# Altium PCB EsoCore_Edge.PcbDoc (part 2 of 6)
Units mil, origin at the board's own origin, x right, y up, seen from the top; angles counter-clockwise.
Board outline 6732.28 x 3385.83 mil, 4 copper layers (Top Layer, Layer 1, Layer 2, Bottom Layer), stack 61.58 mil thick; 330 components, 239 nets, 1236 pads, 712 vias.
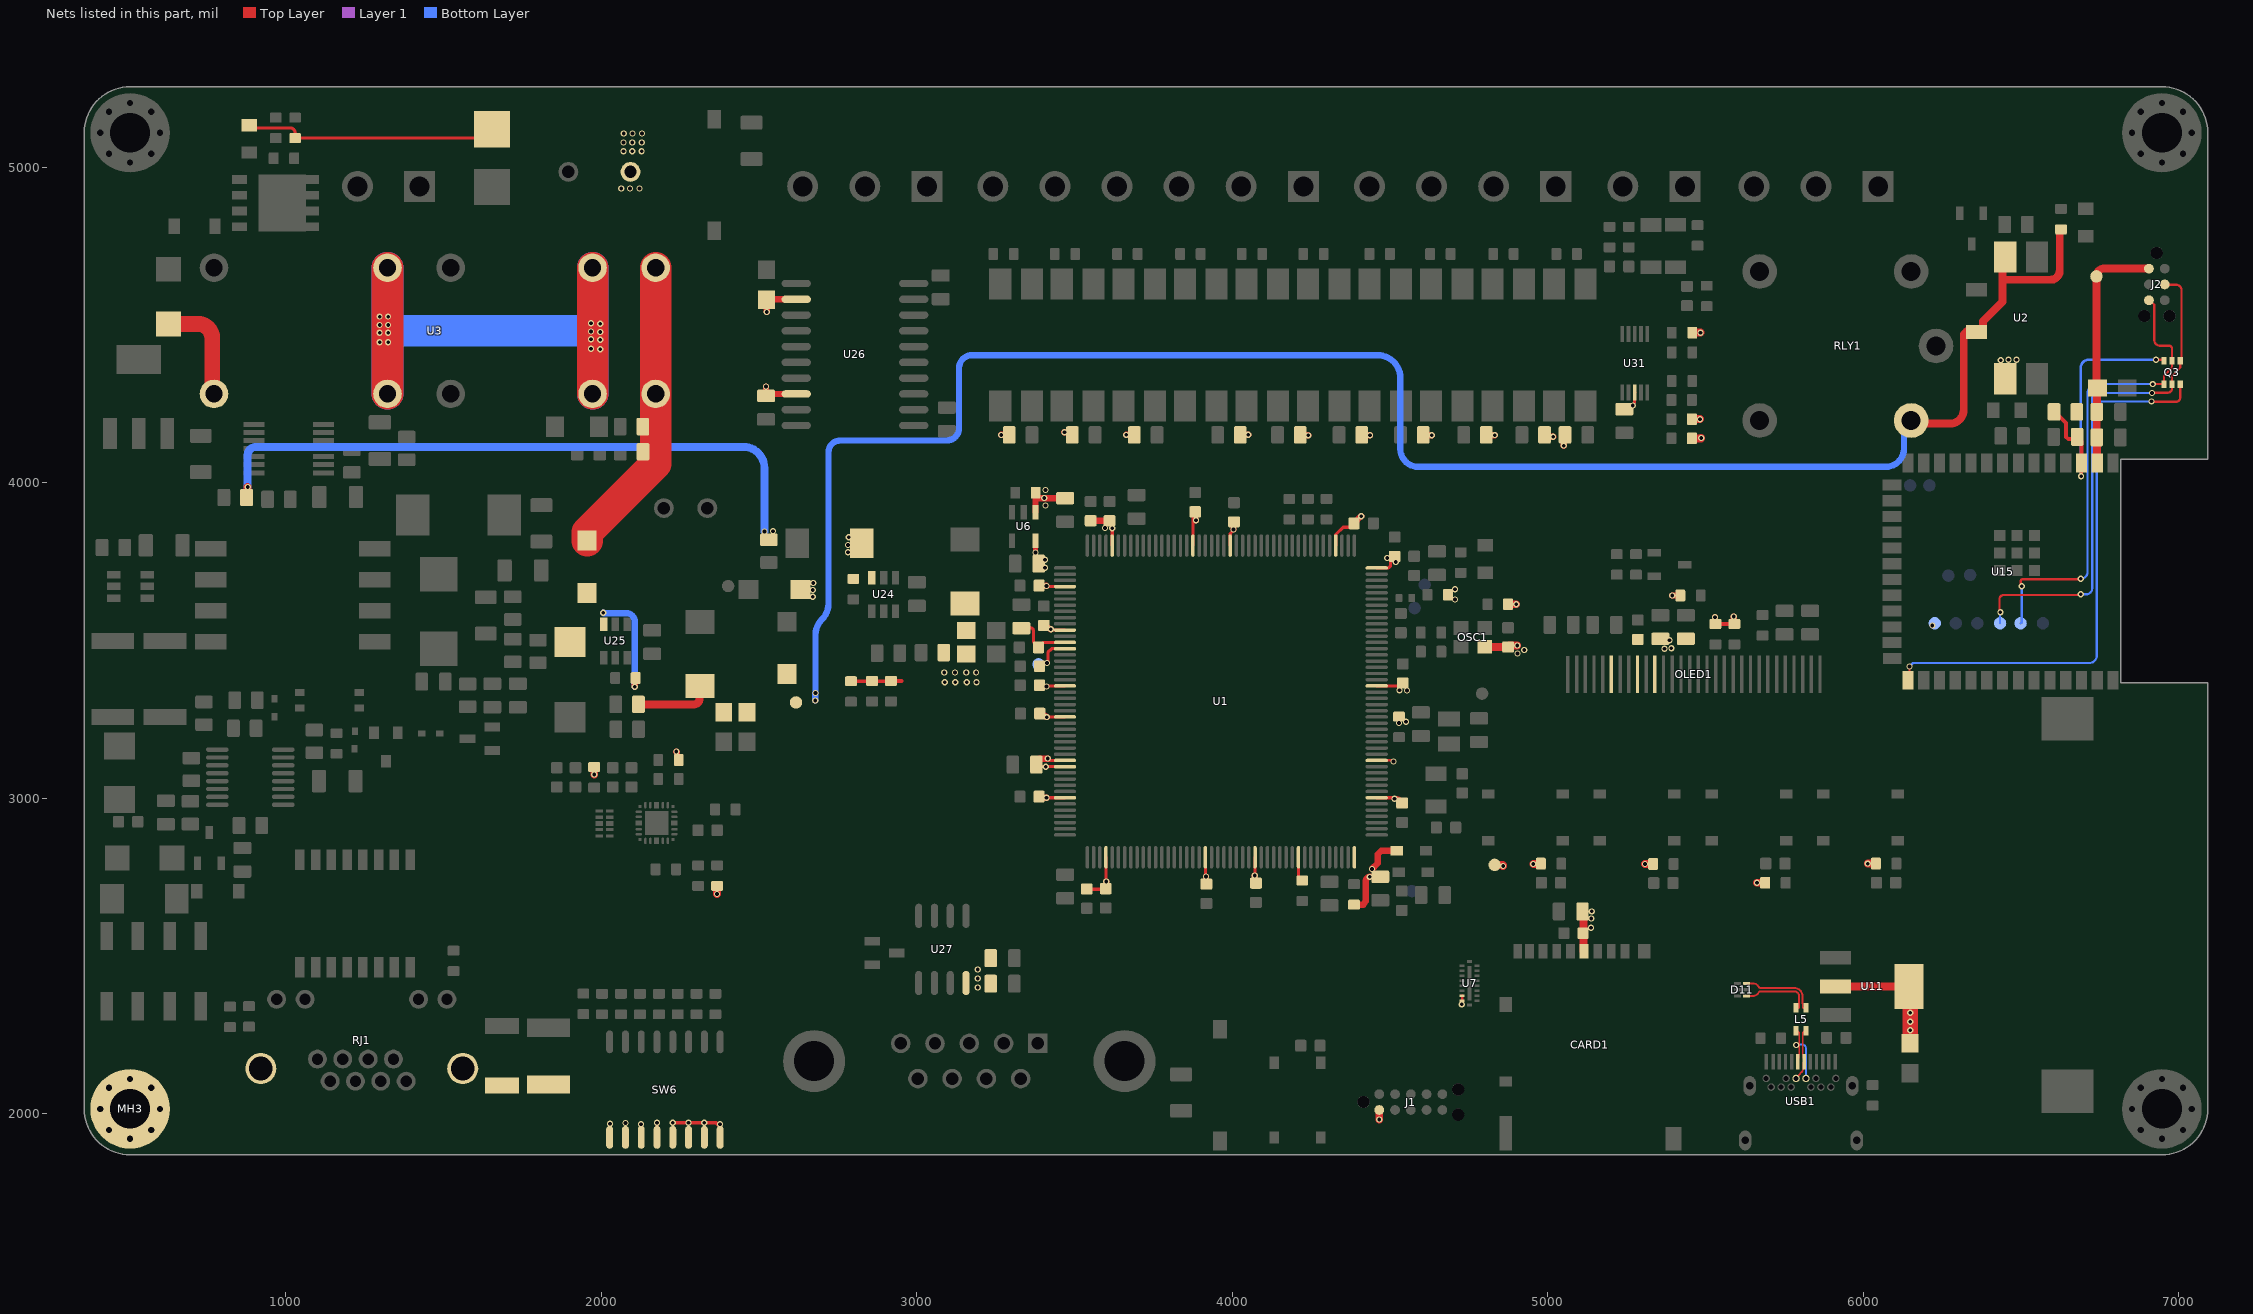
[diagram p4: the nets of this part, all layers, seen from the top]

## Part data
BT1: JLCPCB Part Class="Extended Part", Manufacturer=Keystone, Add into BOM=yes, Convert to PCB=yes, Datasheet=https://atta.szlcsc.com/upload/public/pdf/source/20230320/C1BE6CFA374F9ACD78161F1E1BA128C8.pdf, Device=1060TR, LCSC Part Name=1060TR, Manufacturer Part=1060TR, Supplier=LCSC, Supplier Footprint=SMD, Supplier Part=C238069, Symbol=1060TR
C1 C3 C4 C5 C6 C7 C8 C9 C10 C17 C18 C19 C20 C28 C30 C31 C32 C33 C34 C35 C37 C41 C42 C43 C45 C46 C49 C50 C55 C56 C58 C62 C80 C101 C102: library part CC0603KRX7R9BB104, JLCPCB Part Class="Basic Part", LCSC Part Name="100nF ±10% 50V", Manufacturer=YAGEO(国巨), Temperature Coefficient=X7R, Tolerance=±10%, Voltage Rating=50V, Add into BOM=yes, Convert to PCB=yes, Datasheet=https://item.szlcsc.com/datasheet/CC0603KRX7R9BB104/15331.html, Device=CC0603KRX7R9BB104, Manufacturer Part=CC0603KRX7R9BB104, Supplier=LCSC, Supplier Footprint=0603, Supplier Part=C14663, Symbol=CC0603KRX7R9BB104
C2 C21 C85 C86 C89 C90 C91: library part TAJA226K010RNJ, Equivalent Series Resistance(ESR)=3Ω@100kHz, JLCPCB Part Class="Extended Part", LCSC Part Name="22uF ±10% 10V", Manufacturer="Kyocera AVX", Operating Temperature=-55℃~+125℃, Tolerance=±10%, Voltage Rating=10V, Add into BOM=yes, Convert to PCB=yes, Device=TAJA226K010RNJ, Manufacturer Part=TAJA226K010RNJ, Supplier=LCSC, Supplier Footprint=CASE-A-3216-18(mm), Supplier Part=C11366, Symbol=TAJA226K010RNJ
C11 C27 C29 C53 C54 C57 C74 C78: library part CL21B105KBFNNNE, JLCPCB Part Class="Basic Part", LCSC Part Name="1uF ±10% 50V", Manufacturer=SAMSUNG(三星), Temperature Coefficient=X7R, Tolerance=±10%, Voltage Rating=50V, Add into BOM=yes, Convert to PCB=yes, Datasheet=https://item.szlcsc.com/datasheet/CL21B105KBFNNNE/29074.html, Device=CL21B105KBFNNNE, Manufacturer Part=CL21B105KBFNNNE, Supplier=LCSC, Supplier Footprint=0805, Supplier Part=C28323, Symbol=CL21B105KBFNNNE
C12 C13 C22 C23 C24 C39 C51 C75: library part CL21A475KBQNNNE, JLCPCB Part Class="Extended Part", LCSC Part Name="4.7uF ±10% 50V", Manufacturer=SAMSUNG(三星), Temperature Coefficient=X5R, Tolerance=±10%, Voltage Rating=50V, Add into BOM=yes, Convert to PCB=yes, Datasheet=https://item.szlcsc.com/datasheet/CL21A475KBQNNNE/99401.html, Device=CL21A475KBQNNNE, Manufacturer Part=CL21A475KBQNNNE, Supplier=LCSC, Supplier Footprint=0805, Supplier Part=C98192, Symbol=CL21A475KBQNNNE
C14: library part CL10A106KP8NNNC, JLCPCB Part Class="Basic Part", LCSC Part Name="10uF ±10% 10V", Manufacturer=SAMSUNG(三星), Temperature Coefficient=X5R, Tolerance=±10%, Voltage Rating=10V, Add into BOM=yes, Convert to PCB=yes, Datasheet=https://item.szlcsc.com/datasheet/CL10A106KP8NNNC/20411.html, Device=CL10A106KP8NNNC, Manufacturer Part=CL10A106KP8NNNC, Supplier=LCSC, Supplier Footprint=0603, Supplier Part=C19702, Symbol=CL10A106KP8NNNC
C15: library part TAJC106K035RNJ, Equivalent Series Resistance(ESR)=1.6Ω@100kHz, JLCPCB Part Class="Extended Part", LCSC Part Name="10uF ±10% 35V", Manufacturer="Kyocera AVX", Operating Temperature=-55℃~+125℃, Tolerance=±10%, Voltage Rating=35V, Add into BOM=yes, Convert to PCB=yes, Device=TAJC106K035RNJ, Manufacturer Part=TAJC106K035RNJ, Supplier=LCSC, Supplier Footprint=CASE-C-6032-28(mm), Supplier Part=C7211, Symbol=TAJC106K035RNJ
C16 C36: library part CL10C180JB8NNNC, JLCPCB Part Class="Basic Part", LCSC Part Name="18pF ±5% 50V", Manufacturer=SAMSUNG(三星), Temperature Coefficient=C0G, Tolerance=±5%, Voltage Rating=50V, Add into BOM=yes, Convert to PCB=yes, Datasheet=https://item.szlcsc.com/datasheet/CL10C180JB8NNNC/1999.html, Device=CL10C180JB8NNNC, Manufacturer Part=CL10C180JB8NNNC, Supplier=LCSC, Supplier Footprint=0603, Supplier Part=C1647, Symbol=CL10C180JB8NNNC
C25 C26 C59 C103: JLCPCB Part Class="Extended Part", Manufacturer=SAMSUNG(三星), Manufacturer Part=CL21A106KOQNNNE, nameAlias=Value, spicePre=C, spiceSymbolName=CL21A106KOQNNNE, Supplier=LCSC, Supplier Part=C1713
C38 C52 C63: library part CL21B225KAFNNNE, JLCPCB Part Class="Extended Part", LCSC Part Name="2.2uF ±10% 25V", Manufacturer=SAMSUNG(三星), Temperature Coefficient=X7R, Tolerance=±10%, Voltage Rating=25V, Add into BOM=yes, Convert to PCB=yes, Datasheet=https://item.szlcsc.com/datasheet/CL21B225KAFNNNE/19814.html, Device=CL21B225KAFNNNE, Manufacturer Part=CL21B225KAFNNNE, Supplier=LCSC, Supplier Footprint=0805, Supplier Part=C19110, Symbol=CL21B225KAFNNNE
C40: library part SLA3R8L2060813, Current - Leakage=-, Equivalent Series Resistance(ESR)=500mΩ, JLCPCB Part Class="Extended Part", LCSC Part Name="20F -10%~+30% 3.8V", Manufacturer=Ymin(永铭), Operating Temperature=-40℃~+85℃, Tolerance=-10%~+30%, Voltage Rating=3.8V, Add into BOM=yes, Convert to PCB=yes, Datasheet=https://item.szlcsc.com/datasheet/SLA3R8L2060813/1059775.html, Device=SLA3R8L2060813, Diameter=8mm, Height - Seated(Max)=-, Lifetime=1000hrs@85℃, Manufacturer Part=SLA3R8L2060813, Supplier=LCSC, Supplier Footprint=插件,P=3.5mm, Supplier Part=C970391, Symbol=SLA3R8L2060813
C44: JLCPCB Part Class="Extended Part", Manufacturer=YAGEO(国巨), Manufacturer Part=CC0603KRX7R9BB471, nameAlias=Value, spicePre=C, spiceSymbolName=CC0603KRX7R9BB471, Supplier=LCSC, Supplier Part=C107092
C47 C48: library part CL10B223KB8NNNC, JLCPCB Part Class="Basic Part", LCSC Part Name="22nF ±10% 50V", Manufacturer=SAMSUNG(三星), Temperature Coefficient=X7R, Tolerance=±10%, Voltage Rating=50V, Add into BOM=yes, Convert to PCB=yes, Datasheet=https://item.szlcsc.com/datasheet/CL10B223KB8NNNC/21834.html, Device=CL10B223KB8NNNC, Manufacturer Part=CL10B223KB8NNNC, Supplier=LCSC, Supplier Footprint=0603, Supplier Part=C21122, Symbol=CL10B223KB8NNNC
C60 C61: JLCPCB Part Class="Extended Part", Manufacturer=SAMSUNG(三星), Manufacturer Part=CL21B104KBCNNNC, nameAlias=Value, spicePre=C, spiceSymbolName=CL21B104KBCNNNC, Supplier=LCSC, Supplier Part=C1711
C64: library part ERG35V470M10X16, Equivalent Series Resistance(ESR)=46mΩ@100kHz, JLCPCB Part Class="Extended Part", LCSC Part Name="470uF ±20% 35V", Manufacturer=JIERR(捷而瑞), Operating Temperature=-40℃~+105℃, Ripple Current=1.326A@100kHz, Tolerance=±20%, Voltage Rating=35V, Add into BOM=yes, Convert to PCB=yes, Datasheet=https://item.szlcsc.com/datasheet/ERG35V470M10X16/51248506.html, Device=ERG35V470M10X16, Diameter=10mm, Height - Seated (Max)=16mm, Lifetime=2000hrs@105℃, Manufacturer Part=ERG35V470M10X16, Pin Spacing=5mm, Supplier=LCSC, Supplier Footprint=插件,D10xL16mm, Supplier Part=C48935386, Symbol=ERG35V470M10X16
C72: library part CC1206JRNPOBBN471, JLCPCB Part Class="Extended Part", LCSC Part Name="470pF ±5% 500V", Manufacturer=YAGEO(国巨), Temperature Coefficient=NP0, Tolerance=±5%, Voltage Rating=500V, Add into BOM=yes, Convert to PCB=yes, Datasheet=https://item.szlcsc.com/datasheet/CC1206JRNPOBBN471/604677.html, Device=CC1206JRNPOBBN471, Manufacturer Part=CC1206JRNPOBBN471, Supplier=LCSC, Supplier Footprint=1206, Supplier Part=C577186, Symbol=CC1206JRNPOBBN471
C73: JLCPCB Part Class="Extended Part", Manufacturer=YAGEO(国巨), Manufacturer Part=AC1206JRNPO0BN680, Contributor=lcsc, nameAlias=Value, spicePre=C, spiceSymbolName=AC1206JRNPO0BN680, Supplier=LCSC, Supplier Part=C2227849
C76: library part TAJD337K010RNJ, Equivalent Series Resistance(ESR)=900mΩ@100kHz, JLCPCB Part Class="Extended Part", LCSC Part Name="330uF ±10% 10V", Manufacturer="Kyocera AVX", Operating Temperature=-55℃~+125℃, Tolerance=±10%, Add into BOM=yes, Convert to PCB=yes, Datasheet=https://atta.szlcsc.com/upload/public/pdf/source/20160107/1457707750344.pdf, Device=TAJD337K010RNJ, Manufacturer Part=TAJD337K010RNJ, Supplier=LCSC, Supplier Footprint=CASE-D-7343, Supplier Part=C7226, Symbol=TAJD337K010RNJ
C77: JLCPCB Part Class="Extended Part", Manufacturer=YAGEO(国巨), Manufacturer Part=CC0805JRX7R9BB333, Contributor=LCSC, nameAlias=Value, spicePre=C, spiceSymbolName=CC0805JRX7R9BB333, Supplier=LCSC, Supplier Part=C520043
C79 C84: library part TAJC475K035RNJ, Equivalent Series Resistance(ESR)=2.2Ω@100kHz, JLCPCB Part Class="Extended Part", LCSC Part Name="4.7uF ±10% 35V", Manufacturer="Kyocera AVX", Operating Temperature=-55℃~+125℃, Tolerance=±10%, Voltage Rating=35V, Add into BOM=yes, Convert to PCB=yes, Device=TAJC475K035RNJ, Manufacturer Part=TAJC475K035RNJ, Supplier=LCSC, Supplier Footprint=CASE-C-6032-28(mm), Supplier Part=C11378, Symbol=TAJC475K035RNJ
C81: JLCPCB Part Class="Extended Part", Manufacturer=YAGEO(国巨), Manufacturer Part=CC0805JRX7R9BB273, Contributor=LCSC, nameAlias=Value, spicePre=C, spiceSymbolName=CC0805JRX7R9BB273, Supplier=LCSC, Supplier Part=C520042
C82: library part 2.2nF, JLCPCB Part Class="Extended Part", Manufacturer=FH(风华), Manufacturer Part=1206B222K251NT, Contributor=LCSC, nameAlias=Value, spicePre=C, spiceSymbolName=1206B222K251NT, Supplier=LCSC, Supplier Part=C507085
C83 C87 C92 C93 C94 C95 C96 C97: JLCPCB Part Class="Basic Part", Manufacturer=YAGEO(国巨), Manufacturer Part=CC0805KRX7R9BB104, nameAlias=Value, spicePre=C, spiceSymbolName=CC0805KRX7R9BB104, Supplier=LCSC, Supplier Part=C49678
C98: JLCPCB Part Class="Basic Part", Manufacturer=SAMSUNG(三星), Manufacturer Part=CL31A106KBHNNNE, nameAlias=Value, spicePre=C, spiceSymbolName=CL31A106KBHNNNE, Supplier=LCSC, Supplier Part=C13585
C99: JLCPCB Part Class="Extended Part", Manufacturer=SAMSUNG(三星), Manufacturer Part=CL31B475KBHNNNE, nameAlias=Value, spicePre=C, spiceSymbolName=CL31B475KBHNNNE, Supplier=LCSC, Supplier Part=C51205
C107: library part CC1812KKX7RDBB472, JLCPCB Part Class="Extended Part", LCSC Part Name="4.7nF ±10% 2kV", Manufacturer=YAGEO(国巨), Temperature Coefficient=X7R, Tolerance=±10%, Voltage Rating=2kV, Add into BOM=yes, Convert to PCB=yes, Datasheet=https://item.szlcsc.com/datasheet/CC1812KKX7RDBB472/293127.html, Device=CC1812KKX7RDBB472, Manufacturer Part=CC1812KKX7RDBB472, Supplier=LCSC, Supplier Footprint=1812, Supplier Part=C309511, Symbol=CC1812KKX7RDBB472
CARD1: JLCPCB Part Class="Extended Part", LCSC Part Name="自弹式 MicroSD卡(TF卡) 卡座", Manufacturer=HRS(广濑), Operating Temperature Range=-25℃~+85℃, Add into BOM=yes, Additional Card Detection Pins=None, Card Connection Mode=Self-bouncing, Card Type="MicroSD card (TF card)", Connector Type="Card Slot", Convert to PCB=yes, Datasheet=https://atta.szlcsc.com/upload/public/pdf/source/20170707/1499425911622.pdf, Device=DM3AT-SF-PEJM5, Manufacturer Part=DM3AT-SF-PEJM5, Maximum Body Height=1.68mm, Supplementary Features=-, Supplier=LCSC, Supplier Footprint=SMD, Supplier Part=C114218, Symbol=DM3AT-SF-PEJM5
CN1 CN6: Color=Green, Current Rating=15A, JLCPCB Part Class="Extended Part", LCSC Part Name="1x3P 5mm 排数:1 每排P数:3", Manufacturer=XINLAIYA(新莱亚), Voltage Rating (Max)=300V, Add into BOM=yes, Connector Type="Board Side/Socket - Open", Convert to PCB=yes, Datasheet=https://item.szlcsc.com/datasheet/XY2500R-A-5.00-3P/519088.html, Device=XY2500R-A-5.00-3P, Manufacturer Part=XY2500R-A-5.00-3P, Mounting Type="Right-Angle Pin", Number of Pins=3P, Number of PINs Per Row=3, Number of Positions or Pins=1x3P, Number of Rows=1, Pitch=5mm, Supplier=LCSC, Supplier Footprint=弯插,P=5mm, Supplier Part=C505798, Symbol=XY2500R-A-5.00-3P
CN2 CN3: JLCPCB Part Class="Extended Part", Manufacturer=XINLAIYA(新莱亚), Contributor=LCSC, Manufacturer Part=XY2500R-A-5.00-2P, spicePre=C, spiceSymbolName=XY2500R-A-5.00-2P, Supplier=LCSC, Supplier Part=C505797
CN4: Color=Green, Current Rating=15A, JLCPCB Part Class="Extended Part", LCSC Part Name="1x4P 5mm 排数:1 每排P数:4", Manufacturer=XINLAIYA(新莱亚), Voltage Rating (Max)=300V, Add into BOM=yes, Connector Type="Board Side/Socket - Open", Convert to PCB=yes, Datasheet=https://item.szlcsc.com/datasheet/XY2500R-A-5.00-4P/519089.html, Device=XY2500R-A-5.00-4P, Manufacturer Part=XY2500R-A-5.00-4P, Mounting Type="Right-Angle Pin", Number of Pins=4P, Number of PINs Per Row=4, Number of Positions or Pins=1x4P, Number of Rows=1, Pitch=5mm, Supplier=LCSC, Supplier Footprint=弯插,P=5mm, Supplier Part=C505799, Symbol=XY2500R-A-5.00-4P
CN5: Color=Green, Current Rating=15A, JLCPCB Part Class="Extended Part", LCSC Part Name="1x6P 5mm 排数:1 每排P数:6", Manufacturer=XINLAIYA(新莱亚), Voltage Rating (Max)=300V, Add into BOM=yes, Connector Type="Board Side/Socket - Open", Convert to PCB=yes, Datasheet=https://item.szlcsc.com/datasheet/XY2500R-A-5.00-6P/519091.html, Device=XY2500R-A-5.00-6P, Manufacturer Part=XY2500R-A-5.00-6P, Mounting Type="Right-Angle Pin", Number of Pins=6P, Number of PINs Per Row=6, Number of Positions or Pins=1x6P, Number of Rows=1, Pitch=5mm, Supplier=LCSC, Supplier Footprint=弯插,P=5mm, Supplier Part=C505801, Symbol=XY2500R-A-5.00-6P
D1: JLCPCB Part Class="Extended Part", Manufacturer=VISHAY(威世), Manufacturer Part=ES1D-E3/61T, spicePre=D, spiceSymbolName=ES1D-E3/61T, Supplier=LCSC, Supplier Part=C82648
D2: JLCPCB Part Class="Extended Part", Manufacturer=LGE(鲁光), Contributor=LCSC, Manufacturer Part=BZV55C2V0, spicePre=D, spiceSymbolName=BZV55C2V0, Supplier=LCSC, Supplier Part=C545321
D3 D4: Current - Rectified=100mA, JLCPCB Part Class="Extended Part", LCSC Part Name="电压:30V 电流:100mA", Manufacturer=DIODES(美台), Non-Repetitive Peak Forward Surge Current=600mA, Reverse Leakage Current (Ir)=2uA@25V, Voltage - DC Reverse(Vr)=30V, Voltage - Forward(Vf@If)=1V@100mA, Add into BOM=yes, Convert to PCB=yes, Datasheet=https://item.szlcsc.com/datasheet/BAT54WS-7-F/125480.html, Device=BAT54WS-7-F, Manufacturer Part=BAT54WS-7-F, Supplier=LCSC, Supplier Footprint=SOD-323, Supplier Part=C124205, Symbol=BAT54WS-7-F
D5: JLCPCB Part Class="Extended Part", LCSC Part Name="独立式 耐压:15V 电流:0.1uA@11V", Manufacturer=onsemi(安森美), Operating Junction Temperature Range=-55℃~+150℃, Pd - Power Dissipation=500mW, Reverse Leakage Current (Ir)=100nA@11V, Zener Voltage(Nom)=15V, Zener Voltage(Range)=14.25V~15.75V, Add into BOM=yes, Convert to PCB=yes, Datasheet=https://item.szlcsc.com/datasheet/MMSZ5245BT1G/141016.html, Device=MMSZ5245BT1G, Diode Configuration=Independent, Impedance(Zzk)=600Ω, Impedance(Zzt)=16Ω, Manufacturer Part=MMSZ5245BT1G, Supplier=LCSC, Supplier Footprint=SOD-123, Supplier Part=C129730, Symbol=MMSZ5245BT1G
D11: Clamping Voltage=17V, JLCPCB Part Class="Extended Part", Junction Capacitance=0.65pF, Manufacturer=ST(意法半导体), Reverse Leakage Current (Ir)=500nA, Voltage - Breakdown=6V, Add into BOM=yes, Convert to PCB=yes, Datasheet=https://item.szlcsc.com/datasheet/USBULC6-2M6/703258.html, Device=USBULC6-2M6, LCSC Part Name=USBULC6-2M6, level of protection="IEC 61000-4-2", Manufacturer Part=USBULC6-2M6, Number of Channels=2, Supplier=LCSC, Supplier Footprint=UQFN-6, Supplier Part=C672213, Symbol=USBULC6-2M6, Type=ESD
D12: library part BZT52C8V2_C173432, JLCPCB Part Class="Extended Part", LCSC Part Name="独立式 耐压:8.2V 电流:0.5uA", Manufacturer=MDD(辰达半导体), Pd - Power Dissipation=500mW, Reverse Leakage Current (Ir)=500nA, Zener Voltage(Nom)=8.2V, Zener Voltage(Range)=7.79V~8.61V, Add into BOM=yes, Convert to PCB=yes, Datasheet=https://item.szlcsc.com/datasheet/BZT52C8V2/184821.html, Device=BZT52C8V2_C173432, Diode Configuration=Independent, Impedance(Zzt)=30Ω, Manufacturer Part=BZT52C8V2, Supplier=LCSC, Supplier Footprint=SOD-123, Supplier Part=C173432, Symbol=BZT52C8V2_C173432
D13 D15 D16: Current - Rectified=250mA, JLCPCB Part Class="Extended Part", Manufacturer=Nexperia(安世), Non-Repetitive Peak Forward Surge Current=4A, Operating Junction Temperature Range=-, Pd - Power Dissipation=500mW, Reverse Leakage Current (Ir)=500nA@80V, Voltage - DC Reverse(Vr)=100V, Voltage - Forward(Vf@If)=1.25V@150mA, Add into BOM=yes, Convert to PCB=yes, Datasheet=https://item.szlcsc.com/datasheet/BAS516%252C115/10573.html, Device=BAS516,115, Diode Configuration=Independent, LCSC Part Name=BAS516,115, Manufacturer Part=BAS516,115, Reverse Recovery Time (trr)=4ns, Supplier=LCSC, Supplier Footprint=SOD-523, Supplier Part=C10037, Symbol=BAS516,115
D14: library part SMAJ58A_C151246, Clamping Voltage=93.6V, JLCPCB Part Class="Extended Part", LCSC Part Name="TVS 58V截止 4.3A峰值脉冲", Manufacturer=Littelfuse(美国力特), Operating Temperature=-65℃~+150℃, Peak Pulse Current (Ipp)=4.3A@10/1000us, Peak Pulse Power Dissipation (Ppp)=400W@10/1000us, Reverse Leakage Current (Ir)=1uA, Reverse Stand-Off Voltage (Vrwm)=58V, Voltage - Breakdown=71.2V, Add into BOM=yes, Convert to PCB=yes, Datasheet=https://item.szlcsc.com/datasheet/SMAJ58A/162586.html, Device=SMAJ58A_C151246, level of protection="IEC 61000-4-4；IEC 61000-4-2", Manufacturer Part=SMAJ58A, Polarity=Unidirectional, Supplier=LCSC, Supplier Footprint=DO-214AC(SMA), Supplier Part=C151246, Symbol=SMAJ58A-C151246, Type=TVS
D17: Clamping Voltage=12V, JLCPCB Part Class="Extended Part", Junction Capacitance=30pF, Manufacturer=Littelfuse(美国力特), Operating Temperature=-40℃~+125℃, Peak Pulse Current (Ipp)=-, Reverse Leakage Current (Ir)=100nA, Reverse Stand-Off Voltage (Vrwm)=5.5V, Add into BOM=yes, Convert to PCB=yes, Datasheet=https://item.szlcsc.com/datasheet/SP0502BAHTG/208380.html, Device=SP0502BAHTG, LCSC Part Name=SP0502BAHTG, level of protection="IEC 61000-4-2", Manufacturer Part=SP0502BAHTG, Number of Channels=2, Peak Pulse Power Dissipation (Ppp)=-, Polarity=Unidirectional, Supplier=LCSC, Supplier Footprint=SOT-23, Supplier Part=C207261, Symbol=SP0502BAHTG, Type=TVS, Voltage - Breakdown=-
D18: library part LL4148_C9808, Current - Rectified=200mA, JLCPCB Part Class="Extended Part", LCSC Part Name=停产, Manufacturer=ST(先科), Operating Junction Temperature Range=-, Pd - Power Dissipation=500mW, Reverse Leakage Current (Ir)=5uA@75V, Voltage - DC Reverse(Vr)=75V, Voltage - Forward(Vf@If)=1V@10mA, Add into BOM=yes, Convert to PCB=yes, Datasheet=https://item.szlcsc.com/datasheet/LL4148/10338.html, Device=LL4148_C9808, Diode Configuration=-, Manufacturer Part=LL4148, Reverse Recovery Time (trr)=4ns, Supplier=LCSC, Supplier Footprint=LL-34, Supplier Part=C9808, Symbol=LL4148
D19: library part TPD4E05U06DQAR_C138714, Clamping Voltage=14V, JLCPCB Part Class="Extended Part", Junction Capacitance=0.5pF, LCSC Part Name=单向ESD, Manufacturer=TI(德州仪器), Operating Temperature=-40℃~+125℃, Peak Pulse Current (Ipp)=2.5A@8/20us, Peak Pulse Power Dissipation (Ppp)=40W@8/20us, Reverse Leakage Current (Ir)=10nA, Reverse Stand-Off Voltage (Vrwm)=5.5V, Voltage - Breakdown=6.5V, Add into BOM=yes, Convert to PCB=yes, Datasheet=https://www.ti.com/cn/lit/gpn/tpd4e05u06, Device=TPD4E05U06DQAR_C138714, level of protection="IEC 61000-4-4；IEC 61000-4-5；IEC 61000-4-2", Manufacturer Part=TPD4E05U06DQAR, Number of Channels=4, Polarity=Unidirectional, Supplier=LCSC, Supplier Footprint=USON-10(1x2.5), Supplier Part=C138714, Symbol=TPD4E05U06DQAR_C138714, Type=TVS
J1: "MSP-FET430 Flash Emulation Tool Plug-Of-Nailsâ„¢ Adapter Cable", Package=None, Check_prices=https://www.snapeda.com/parts/TC2050-IDC-NL/Tag-Connect/view-part/?ref=eda, MF="Tag-Connect LLC", MP=TC2050-IDC-NL, SnapEDA_Link=https://www.snapeda.com/parts/TC2050-IDC-NL/Tag-Connect/view-part/?ref=snap
J2: "PLUG-OF-NAILS 6-PIN W/O LEGS 8", Package=None, Check_prices=https://www.snapeda.com/parts/TC2030-IDC-NL/Tag-Connect/view-part/?ref=eda, MF=Tag-Connect, MP=TC2030-IDC-NL, SnapEDA_Link=https://www.snapeda.com/parts/TC2030-IDC-NL/Tag-Connect/view-part/?ref=snap
J4: Colour=Black, Current Rating-Power (Max)=-, Current Rating-Signal (Max)=3A, JLCPCB Part Class="Extended Part", LCSC Part Name="D-Sub 母 P数:9P 1200/盒 带六角螺丝", Manufacturer=CONNFLY, Operating Temperature Range=-40℃~+105℃, Add into BOM=yes, Connector Type="Standard D-Sub", Convert to PCB=yes, Datasheet=https://atta.szlcsc.com/upload/public/pdf/source/20241014/2E52C80238FADC5DB5725AE5600FD7FE.pdf, Device=DS1037-09FNAKT74-0CC, Gender=Mother, Manufacturer Part=DS1037-09FNAKT74-0CC, Mounting Style=Bend-in, Number of Pins=9P, Number of Rows=2, Rated Voltage (Max)=-, Supplier=LCSC, Supplier Footprint=弯插, Supplier Part=C75749, Symbol=DS1037-09FNAKT74-0CC
L2 L4: Current Rating=350mA, DC Resistance(DCR)=500mΩ, Impedance @ Frequency=600Ω@100MHz, JLCPCB Part Class="Extended Part", LCSC Part Name="单路 0603磁珠 阻抗600Ω@100MHz", Manufacturer=TAI-TECH(台庆), Tolerance=±25%, Add into BOM=yes, Convert to PCB=yes, Datasheet=https://item.szlcsc.com/datasheet/FCM1608KF-601T03/153054.html, Device=FCM1608KF-601T03, Manufacturer Part=FCM1608KF-601T03, Number of Circuits=1, Supplier=LCSC, Supplier Footprint=0603, Supplier Part=C141723, Symbol=FCM1608KF-601T03
L3: library part LQM2MPN2R2NG0L, JLCPCB Part Class="Extended Part", LCSC Part Name="2.2uH ±30%", Manufacturer=muRata(村田), Q @ Freq=-, Tolerance=±30%, Add into BOM=yes, Convert to PCB=yes, Datasheet=https://atta.szlcsc.com/upload/public/pdf/source/20170325/1490427881182.pdf, Device=LQM2MPN2R2NG0L, Manufacturer Part=LQM2MPN2R2NG0L, Saturation Current (Isat)=-, Supplier=LCSC, Supplier Footprint=0806, Supplier Part=C83998, Symbol=LQM2MPN2R2NG0L
L5: Current Rating=330mA, DC Resistance(DCR)=-, Impedance @ Frequency=90Ω@100MHz, JLCPCB Part Class="Extended Part", LCSC Part Name="两路 贴片共模滤波器 阻抗90Ω@100MHz", Manufacturer=muRata(村田), Operating Temperature=-40℃~+85℃, Add into BOM=yes, Convert to PCB=yes, Datasheet=https://item.szlcsc.com/datasheet/DLW21SN900SQ2L/99065.html, Device=DLW21SN900SQ2L, Manufacturer Part=DLW21SN900SQ2L, Number of Lines=2, Supplier=LCSC, Supplier Footprint=SMD-4P,2x1.2mm, Supplier Part=C97856, Symbol=DLW21SN900SQ2L, Voltage Rating - DC=-
L6: library part PSPMAA0503-3R3M-ANP, Current - Saturation(Isat)=6A, Current Rating=5A, DC Resistance(DCR)=38mΩ, JLCPCB Part Class="Extended Part", LCSC Part Name="3.3uH ±20% 6A", Manufacturer=PROD(谱罗德), Ratings=AEC-Q200, Tolerance=±20%, Add into BOM=yes, Convert to PCB=yes, Datasheet=https://item.szlcsc.com/datasheet/PSPMAA0503-3R3M-ANP/434313.html, Device=PSPMAA0503-3R3M-ANP, Manufacturer Part=PSPMAA0503-3R3M-ANP, Supplier=LCSC, Supplier Footprint=SMD,5.4x5.2mm, Supplier Part=C436534, Symbol=PSPMAA0503-3R3M-ANP
L7 L8: library part SLO0530H6R8MTT, Current Rating=4A, DC Resistance(DCR)=66mΩ, JLCPCB Part Class="Extended Part", LCSC Part Name="6.8uH ±20%", Manufacturer=Sunltech(顺磁), Tolerance=±20%, Add into BOM=yes, Convert to PCB=yes, Datasheet=https://item.szlcsc.com/datasheet/SLO0530H6R8MTT/306182.html, Device=SLO0530H6R8MTT, Manufacturer Part=SLO0530H6R8MTT, Supplier=LCSC, Supplier Footprint=SMD, Supplier Part=C325965, Symbol=SLO0530H6R8MTT
LED1: Color Temperature=-, Forward Current=20mA, Illumination Color=Blue, JLCPCB Part Class="Extended Part", Lens Color="Water Clear", Manufacturer=XINGLIGHT(成兴光), Power(Watts)=70mW, Voltage - Forward(Vf)=3.2V, Add into BOM=yes, Convert to PCB=yes, Datasheet=https://item.szlcsc.com/datasheet/XL-2012UBC/1051426.html, Device=XL-2012UBC, Diode Configuration=-, Lamp Holder Type=-, LCSC Part Name=XL-2012UBC, Luminous Intensity=260mcd, Manufacturer Part=XL-2012UBC, Mounting Style="op View Mount", Operating Temperature=-, Peak Wavelength=470nm, Supplier=LCSC, Supplier Footprint=0805, Supplier Part=C965817, Symbol=XL-2012UBC, Viewing Angle=120°, Wavelength - Dominant=460nm~475nm
LED2 LED3: Color Temperature=-, Emitted Color=Red, Forward Current=20mA, Forward Voltage (VF)=1.8V~2.4V, JLCPCB Part Class="Extended Part", Manufacturer=YONGYUTAI(永裕泰), Operating Temperature=-40℃~+85℃, Power Dissipation=60mW, Add into BOM=yes, Convert to PCB=yes, Datasheet=https://atta.szlcsc.com/upload/public/pdf/source/20231027/AB486D22E6D71BC59190C48A798367E6.pdf, Device=YLED0805R, Diode Configuration=-, Dominant Wavelength=615nm~630nm, LCSC Part Name=YLED0805R, Lens Color=-, Luminous Intensity=-, Manufacturer Part=YLED0805R, Mounting Sytle=-, Peak Wavelength=645nm, Supplier=LCSC, Supplier Footprint=0805, Supplier Part=C19171391, Symbol=YLED0805R, Viewing Angle=-
LED4: Color Temperature=-, Forward Current=20mA, Illumination Color=Emerald, JLCPCB Part Class="Extended Part", Lens Color="Colorless Transparent Lens", Manufacturer=XINGLIGHT(成兴光), Operating Temperature=-20℃~+85℃, Power(Watts)=70mW, Voltage - Forward(Vf)=3.2V, Add into BOM=yes, Convert to PCB=yes, Datasheet=https://item.szlcsc.com/datasheet/XL-2012UGC/1051424.html, Device=XL-2012UGC, LCSC Part Name=XL-2012UGC, Luminous Intensity=750mcd, Manufacturer Part=XL-2012UGC, Mounting Sytle="Positive Stick", Peak Wavelength=525nm, Supplier=LCSC, Supplier Footprint=0805, Supplier Part=C965815, Symbol=XL-2012UGC, Viewing Angle=120°, Wavelength - Dominant=515nm~535nm
OLED1: JLCPCB Part Class="Extended Part", LCSC Part Name="0.96寸 白色 128x64像素分辨率 单色 30PIN", Manufacturer=Wisevision(新智景), Add into BOM=yes, Controller Type=SSD1306, Convert to PCB=yes, Device=N096-2864KSWEG01-H30, Manufacturer Part=N096-2864KSWEG01-H30, Size=0.96, Supplier=LCSC, Supplier Footprint=-, Supplier Part=C2890596, Symbol=N096-2864KSWEG01-H30
OSC1: library part OT3EL89CJI-111YLC-25M, Frequency Stability=±20ppm, JLCPCB Part Class="Extended Part", LCSC Part Name="YSO110TR 25MHZ 4P 2520 1.8V-3.3V ±10PPM -40~85℃（±20PPM) CMOS", Manufacturer=YXC(扬兴晶振), Normal temperature Frequency Tolerance=±10ppm, Operating Temperature=-40℃~+85℃, Voltage - Supply=1.8V~3.3V, Add into BOM=yes, Convert to PCB=yes, Datasheet=https://item.szlcsc.com/datasheet/OT3EL89CJI-111YLC-25M/8526919.html, Device=OT3EL89CJI-111YLC-25M, Manufacturer Part=OT3EL89CJI-111YLC-25M, Output Type=CMOS, Supplier=LCSC, Supplier Footprint=SMD2520-4P, Supplier Part=C7471623, Symbol=OT3EL89CJI-111YLC-25M
Q1: Current - Continuous Drain(Id)=200mA, Drain to Source Voltage=50V, Gate Threshold Voltage (Vgs(th))=500mV, Input Capacitance(Ciss)=50pF@25V, JLCPCB Part Class="Extended Part", LCSC Part Name="1个N沟道 耐压:50V 电流:200mA", Manufacturer=onsemi(安森美), Operating Temperature=-55℃~+150℃, Pd - Power Dissipation=225mW, Reverse Transfer Capacitance (Crss@Vds)=5pF@25V, Add into BOM=yes, Convert to PCB=yes, Datasheet=https://item.szlcsc.com/datasheet/BSS138LT1G/83200.html, Device=BSS138LT1G, Manufacturer Part=BSS138LT1G, Number="1 N-Channel", RDS(on)=5.6Ω@2.75V, Supplier=LCSC, Supplier Footprint=SOT-23, Supplier Part=C82045, Symbol=BSS138LT1G
Q2: Current - Continuous Drain(Id)=75A, Drain to Source Voltage=100V, Gate Threshold Voltage (Vgs(th))=2.3V@250uA, Input Capacitance(Ciss)=1.916nF, JLCPCB Part Class="Extended Part", LCSC Part Name=N沟道100V快速开关MOSFET, Manufacturer=XNRUSEMI(新锐), Operating Temperature=-55℃~+150℃, Output Capacitance(Coss)=602pF, Pd - Power Dissipation=108W, Reverse Transfer Capacitance (Crss@Vds)=17pF, Add into BOM=yes, Convert to PCB=yes, Datasheet=https://item.szlcsc.com/datasheet/XRS75N10F/49533440.html, Device=XRS75N10F, Gate Charge(Qg)=32.1nC@10V, Manufacturer Part=XRS75N10F, RDS(on)=7.75mΩ@10V, Supplier=LCSC, Supplier Footprint=PDFN5060-8L, Supplier Part=C47325010, Symbol=XRS75N10F, Type=N-Channel
Q3: Collector - Emitter Voltage VCEO=50V, Current - Collector(Ic)=100mA, DC Current Gain=100@1mA,5V, Input Resistor=6.11kΩ, JLCPCB Part Class="Extended Part", Manufacturer=CJ(江苏长电/长晶), Operating Temperature=-55℃~+150℃, Pd - Power Dissipation=150mW, Add into BOM=yes, Convert to PCB=yes, Datasheet=https://atta.szlcsc.com/upload/public/pdf/source/20151109/1457707575095.pdf, Device=UMH3N, LCSC Part Name=UMH3N, Manufacturer Part=UMH3N, Supplier=LCSC, Supplier Footprint=SC-70-6(SOT-363), Supplier Part=C62892, Symbol=UMH3N, Type=-
Q4: Collector - Emitter Voltage VCEO=300V, Current - Collector Cutoff=100nA, Current - Collector(Ic)=500mA, DC Current Gain=25@10mA,10V, JLCPCB Part Class="Extended Part", LCSC Part Name="NPN 电流:500mA 电压:300V", Manufacturer=onsemi(安森美), Operating Temperature=-55℃~+150℃, Pd - Power Dissipation=225mW, Transition frequency(fT)=50MHz, Add into BOM=yes, Convert to PCB=yes, Datasheet=https://item.szlcsc.com/datasheet/MMBTA42LT1G/95587.html, Device=MMBTA42LT1G, Manufacturer Part=MMBTA42LT1G, Supplier=LCSC, Supplier Footprint=SOT-23, Supplier Part=C94389, Symbol=MMBTA42LT1G, Type=NPN, Vce Saturation(VCE(sat))=500mV
Q5: Current - Continuous Drain(Id)=3.2A, Gate Threshold Voltage (Vgs(th)@Id)=2.5V, Input Capacitance(Ciss@Vds)=424pF@50V, JLCPCB Part Class="Extended Part", LCSC Part Name="1个N沟道 耐压:100V 电流:3.2A", Manufacturer=VBsemi(微碧半导体), Pd - Power Dissipation=1.3W, Reverse Transfer Capacitance (Crss@Vds)=42pF@50V, Add into BOM=yes, Convert to PCB=yes, Datasheet=https://atta.szlcsc.com/upload/public/pdf/source/20221101/E06AFB8796F00FBE54442A2AA46A0081.pdf, Device=SI3440DV-VB, Gate Charge(Qg)=8.2nC@4.5V, Manufacturer Part=SI3440DV-VB, RDS(on)=-, Supplier=LCSC, Supplier Footprint=SOT-23-6, Supplier Part=C710066, Symbol=SI3440DV, Type="1 N-channel"
Q6: Drain Source On Resistance (RDS(on)@Vgs,Id)=7.5Ω@10V,500mA, Gate Threshold Voltage (Vgs(th)@Id)=2.5V@250uA, Input Capacitance (Ciss@Vds)=50pF@25V, JLCPCB Part Class="Extended Part", LCSC Part Name="1个N沟道 耐压:60V 电流:115mA", Manufacturer=onsemi(安森美), Operating Temperature=-55℃~+150℃, Reverse Transfer Capacitance (Crss@Vds)=5pF@25V, Add into BOM=yes, Convert to PCB=yes, Datasheet=https://atta.szlcsc.com/upload/public/pdf/source/20140815/1457707218098.pdf, Device=2N7002LT1G, Manufacturer Part=2N7002LT1G, Supplier=LCSC, Supplier Footprint=SOT-23, Supplier Part=C16338, Symbol=2N7002LT1G, Type="1 N-Channel"
Q7: Collector - Emitter Voltage VCEO=30V, Current - Collector Cutoff=100nA, Current - Collector(Ic)=100mA, DC Current Gain=110@2mA,5V, JLCPCB Part Class="Extended Part", LCSC Part Name="hfe=110~220 NPN 电流:0.1A 电压:30V", Manufacturer=CJ(江苏长电/长晶), Operating Temperature=-55℃~+150℃, Pd - Power Dissipation=200mW, Transition frequency(fT)=100MHz, Add into BOM=yes, Convert to PCB=yes, Datasheet=https://item.szlcsc.com/datasheet/BC848A(RANGE%253A110-220)/9071.html, Device=BC848A(RANGE:110-220), Manufacturer Part=BC848A(RANGE:110-220), Supplier=LCSC, Supplier Footprint=SOT-23, Supplier Part=C8576, Symbol=BC848A, Type=NPN, Vce Saturation(VCE(sat))=500mV
Q8: JLCPCB Part Class="Extended Part", Manufacturer=DIODES(美台), Contributor=LCSC, Manufacturer Part=DMN15H310SE-13, spicePre=Q, spiceSymbolName=DMN15H310SE-13, Supplier=LCSC, Supplier Part=C155224
R1 R2 R3: JLCPCB Part Class="Extended Part", Manufacturer=YAGEO(国巨), Manufacturer Part=RC0805FR-072K2L, nameAlias=Value, spicePre=R, spiceSymbolName=RC0805FR-072K2L, Supplier=LCSC, Supplier Part=C114561
R4: JLCPCB Part Class="Extended Part", Manufacturer=YAGEO(国巨), Manufacturer Part=RC0402FR-070RL, nameAlias=Value, spicePre=R, spiceSymbolName=RC0402FR-070RL, Supplier=LCSC, Supplier Part=C106231
R5 R6 R7 R10 R11 R15 R18 R20 R21 R24 R25 R31 R37 R38 R40 R46 R82 R83 R84 R85 R86 R88 R89 R113 R114 R115: JLCPCB Part Class="Extended Part", Manufacturer=YAGEO(国巨), Manufacturer Part=RC0603FR-0710KL, nameAlias=Value, spicePre=R, spiceSymbolName=RC0603FR-0710KL, Supplier=LCSC, Supplier Part=C98220
R8 R9 R12 R14 R16: JLCPCB Part Class="Extended Part", Manufacturer=YAGEO(国巨), Manufacturer Part=RC0603FR-0733RL, nameAlias=Value, spicePre=R, spiceSymbolName=RC0603FR-0733RL, Supplier=LCSC, Supplier Part=C108661
R13: JLCPCB Part Class="Basic Part", Manufacturer=UNI-ROYAL(厚声), Manufacturer Part=0603WAF1501T5E, nameAlias=Value, spicePre=R, spiceSymbolName=0603WAF1501T5E, Supplier=LCSC, Supplier Part=C22843
R17 R19: JLCPCB Part Class="Extended Part", Manufacturer=YAGEO(国巨), Manufacturer Part=RC0603FR-07270RL, nameAlias=Value, spicePre=R, spiceSymbolName=RC0603FR-07270RL, Supplier=LCSC, Supplier Part=C137754
R22: JLCPCB Part Class="Extended Part", Manufacturer=YAGEO(国巨), Manufacturer Part=RC0603FR-07910KL, nameAlias=Value, spicePre=R, spiceSymbolName=RC0603FR-07910KL, Supplier=LCSC, Supplier Part=C137672
R23: library part 6.49kΩ, JLCPCB Part Class="Extended Part", Manufacturer=YAGEO(国巨), Manufacturer Part=RT0603BRC076K49L, Contributor=lcsc, nameAlias=Value, spicePre=U, spiceSymbolName=RT0603BRC076K49L, Supplier=LCSC, Supplier Part=C860999
R26 R36: JLCPCB Part Class="Extended Part", Manufacturer=FOJAN(富捷), Manufacturer Part="FRC0603J510 TS", Contributor=lcsc, nameAlias=Value, spicePre=R, spiceSymbolName="FRC0603J510 TS", Supplier=LCSC, Supplier Part=C2907181
R27 R28: JLCPCB Part Class="Extended Part", Manufacturer=YAGEO(国巨), Manufacturer Part=RC0603FR-074K7L, nameAlias=Value, spicePre=R, spiceSymbolName=RC0603FR-074K7L, Supplier=LCSC, Supplier Part=C99782
R29: JLCPCB Part Class="Extended Part", Manufacturer=YAGEO(国巨), Manufacturer Part=RC0805FR-0710KL, nameAlias=Value, spicePre=R, spiceSymbolName=RC0805FR-0710KL, Supplier=LCSC, Supplier Part=C84376
R30: library part RC0603FR-071KL, JLCPCB Part Class="Extended Part", LCSC Part Name="厚膜电阻 1kΩ ±1% 100mW", Manufacturer=YAGEO(国巨), Operating Temperature=-55℃~+155℃, Power(Watts)=100mW, Temperature Coefficient=±100ppm/℃, Tolerance=±1%, Voltage-Supply(Max)=75V, Add into BOM=yes, Convert to PCB=yes, Datasheet=https://atta.szlcsc.com/upload/public/pdf/source/20180316/70C0E2BDAE7FCC62C531A5A58D202EE1.pdf, Device=RC0603FR-071KL, Manufacturer Part=RC0603FR-071KL, Supplier=LCSC, Supplier Footprint=0603, Supplier Part=C22548, Symbol=RC0603FR-071KL, Type="Thick Film Resistors"
R32 R33 R62 R65 R70 R71 R72 R73 R74 R75: library part RC0603FR-0710KL, JLCPCB Part Class="Extended Part", LCSC Part Name="厚膜电阻 10kΩ ±1% 100mW", Manufacturer=YAGEO(国巨), Operating Temperature Range=-55℃~+155℃, Temperature Coefficient=±100ppm/℃, Tolerance=±1%, Add into BOM=yes, Convert to PCB=yes, Datasheet=https://atta.szlcsc.com/upload/public/pdf/source/20180927/C295883_E8D83085EA81BD7DE0B2B681138C15EE.pdf, Device=RC0603FR-0710KL, Manufacturer Part=RC0603FR-0710KL, Supplier=LCSC, Supplier Footprint=0603, Supplier Part=C98220, Symbol=RC0603FR-0710KL, Type="Thick Film Resistors"
R34: library part RC0603FR-0722RL, JLCPCB Part Class="Extended Part", LCSC Part Name="厚膜电阻 22Ω ±1% 100mW", Manufacturer=YAGEO(国巨), Operating Temperature Range=-55℃~+155℃, Temperature Coefficient=±100ppm/℃, Tolerance=±1%, Add into BOM=yes, Convert to PCB=yes, Datasheet=https://atta.szlcsc.com/upload/public/pdf/source/20170914/C127450_1505359406912967677.pdf, Device=RC0603FR-0722RL, Manufacturer Part=RC0603FR-0722RL, Supplier=LCSC, Supplier Footprint=0603, Supplier Part=C107701, Symbol=RC0603FR-0722RL, Type="Thick Film Resistors"
R35: library part RCV20101M00FKEFAT, JLCPCB Part Class="Extended Part", LCSC Part Name="厚膜电阻 1MΩ ±1% 750mW", Manufacturer=VISHAY(威世), Operating Temperature=-55℃~+155℃, Power(Watts)=750mW, Temperature Coefficient=±100ppm/℃, Tolerance=±1%, Voltage-Supply(Max)=2kV, Add into BOM=yes, Convert to PCB=yes, Datasheet=https://atta.szlcsc.com/upload/public/pdf/source/20210531/5E5F97DE5A0A27C89BE556AD1B7EFE5C.pdf, Device=RCV20101M00FKEFAT, Manufacturer Part=RCV20101M00FKEFAT, Supplier=LCSC, Supplier Footprint=2010, Supplier Part=C1513439, Symbol=RCV20101M00FKEFAT, Type="Thick Film Resistors"
R39: library part 0603WAF5601T5E, JLCPCB Part Class="Basic Part", LCSC Part Name="5.6kΩ ±1% 100mW 厚膜电阻", Manufacturer=UNI-ROYAL(厚声), Operating Temperature=-55℃~+155℃, Power(Watts)=100mW, Temperature Coefficient=±100ppm/℃, Tolerance=±1%, Voltage-Supply(Max)=75V, Add into BOM=yes, Convert to PCB=yes, Datasheet=https://item.szlcsc.com/datasheet/0603WAF5601T5E/23916.html, Device=0603WAF5601T5E, Manufacturer Part=0603WAF5601T5E, Supplier=LCSC, Supplier Footprint=0603, Supplier Part=C23189, Symbol=0603WAF5601T5E, Type="Thick Film Resistor"
R41 R42: JLCPCB Part Class="Extended Part", Manufacturer=YAGEO(国巨), Manufacturer Part=RC0603FR-075K1L, nameAlias=Value, spicePre=R, spiceSymbolName=RC0603FR-075K1L, Supplier=LCSC, Supplier Part=C105580
R43: library part RC0603FR-07220RL, JLCPCB Part Class="Extended Part", LCSC Part Name="厚膜电阻 220Ω ±1% 100mW", Manufacturer=YAGEO(国巨), Operating Temperature Range=-55℃~+155℃, Temperature Coefficient=±100ppm/℃, Tolerance=±1%, Add into BOM=yes, Convert to PCB=yes, Datasheet=https://atta.szlcsc.com/upload/public/pdf/source/20180821/C275644_0D56F95EFF785E7D9A1FEF436B37DA78.pdf, Device=RC0603FR-07220RL, Manufacturer Part=RC0603FR-07220RL, Supplier=LCSC, Supplier Footprint=0603, Supplier Part=C107696, Symbol=RC0603FR-07220RL, Type="Thick Film Resistors"
R44 R45: library part RT0603BRE075KL, JLCPCB Part Class="Extended Part", LCSC Part Name="薄膜电阻 5kΩ ±0.1% 100mW", Manufacturer=YAGEO(国巨), Operating Temperature Range=-55℃~+155℃, Temperature Coefficient=±50ppm/℃, Tolerance=±0.1%, Add into BOM=yes, Convert to PCB=yes, Datasheet=https://atta.szlcsc.com/upload/public/pdf/source/20200610/C326738_5639A9F1B6EB6E4AE2197577D3456E7F.pdf, Device=RT0603BRE075KL, Manufacturer Part=RT0603BRE075KL, Supplier=LCSC, Supplier Footprint=0603, Supplier Part=C862232, Symbol=RT0603BRE075KL, Type="Thin Film Resistor"
R47: library part RC1206FR-0710RL, JLCPCB Part Class="Extended Part", LCSC Part Name="厚膜电阻 10Ω ±1% 250mW", Manufacturer=YAGEO(国巨), Operating Temperature Range=-55℃~+155℃, Power(Watts)=250mW, Temperature Coefficient=±200ppm/℃, Tolerance=±1%, Add into BOM=yes, Convert to PCB=yes, Datasheet=https://atta.szlcsc.com/upload/public/pdf/source/20180821/C275644_0D56F95EFF785E7D9A1FEF436B37DA78.pdf, Device=RC1206FR-0710RL, Manufacturer Part=RC1206FR-0710RL, Supplier=LCSC, Supplier Footprint=1206, Supplier Part=C108080, Symbol=RC1206FR-0710RL, Type="Thick Film Resistors"
R48 R49: library part RC0805JR-07220KL, JLCPCB Part Class="Extended Part", LCSC Part Name="厚膜电阻 220kΩ ±5% 125mW", Manufacturer=YAGEO(国巨), Operating Temperature=-55℃~+155℃, Power(Watts)=125mW, Temperature Coefficient=±100ppm/℃, Tolerance=±5%, Voltage-Supply(Max)=150V, Add into BOM=yes, Convert to PCB=yes, Datasheet=https://atta.szlcsc.com/upload/public/pdf/source/20250610/89E4D743C004A82A45145C7A2CC3A578.pdf, Device=RC0805JR-07220KL, Manufacturer Part=RC0805JR-07220KL, Supplier=LCSC, Supplier Footprint=0805, Supplier Part=C114232, Symbol=RC0805JR-07220KL, Type="Thick Film Resistor"
R50 R106: library part RC0805FR-07100RL, JLCPCB Part Class="Extended Part", LCSC Part Name="厚膜电阻 100Ω ±1% 125mW", Manufacturer=YAGEO(国巨), Operating Temperature=-55℃~+155℃, Power(Watts)=125mW, Temperature Coefficient=±100ppm/℃, Tolerance=±1%, Voltage-Supply(Max)=150V, Add into BOM=yes, Convert to PCB=yes, Datasheet=https://item.szlcsc.com/datasheet/RC0805FR-07100RL/106792.html, Device=RC0805FR-07100RL, Manufacturer Part=RC0805FR-07100RL, Supplier=LCSC, Supplier Footprint=0805, Supplier Part=C105577, Symbol=RC0805FR-07100RL, Type="Thick Film Resistor"
R51 R107: library part RC0805FR-07510RL, JLCPCB Part Class="Extended Part", LCSC Part Name="厚膜电阻 510Ω ±1% 125mW", Manufacturer=YAGEO(国巨), Operating Temperature Range=-55℃~+155℃, Temperature Coefficient=±100ppm/℃, Tolerance=±1%, Add into BOM=yes, Convert to PCB=yes, Datasheet=https://atta.szlcsc.com/upload/public/pdf/source/20180821/C275644_0D56F95EFF785E7D9A1FEF436B37DA78.pdf, Device=RC0805FR-07510RL, Manufacturer Part=RC0805FR-07510RL, Supplier=LCSC, Supplier Footprint=0805, Supplier Part=C114563, Symbol=RC0805FR-07510RL, Type="Thick Film Resistors"
R52: library part 1206W4F4700T5E, JLCPCB Part Class="Extended Part", LCSC Part Name="470Ω ±1% 250mW 厚膜电阻", Manufacturer=UNI-ROYAL(厚声), Operating Temperature Range=-55℃~+155℃, Temperature Coefficient=±100ppm/℃, Tolerance=±1%, Add into BOM=yes, Convert to PCB=yes, Datasheet=https://atta.szlcsc.com/upload/public/pdf/source/20200306/C422600_1E6D84923E4A46A82E41ADD87F860B5C.pdf, Device=1206W4F4700T5E, Manufacturer Part=1206W4F4700T5E, Supplier=LCSC, Supplier Footprint=1206, Supplier Part=C4502, Symbol=1206W4F4700T5E, Type="Thick Film Resistors"
R53: library part RC0805JR-074K7L, JLCPCB Part Class="Extended Part", LCSC Part Name="厚膜电阻 4.7kΩ ±5% 125mW", Manufacturer=YAGEO(国巨), Operating Temperature=-55℃~+155℃, Power(Watts)=125mW, Temperature Coefficient=±100ppm/℃, Tolerance=±5%, Voltage-Supply(Max)=150V, Add into BOM=yes, Convert to PCB=yes, Datasheet=https://item.szlcsc.com/datasheet/RC0805JR-074K7L/106642.html, Device=RC0805JR-074K7L, Manufacturer Part=RC0805JR-074K7L, Supplier=LCSC, Supplier Footprint=0805, Supplier Part=C105427, Symbol=RC0805JR-074K7L, Type="Thick Film Resistors"
R54 R59: library part RC0805FR-07100KL, JLCPCB Part Class="Extended Part", LCSC Part Name="厚膜电阻 100kΩ ±1% 125mW", Manufacturer=YAGEO(国巨), Operating Temperature=-55℃~+155℃, Power(Watts)=125mW, Temperature Coefficient=±100ppm/℃, Tolerance=±1%, Voltage-Supply(Max)=150V, Add into BOM=yes, Convert to PCB=yes, Datasheet=https://item.szlcsc.com/datasheet/RC0805FR-07100KL/97550.html, Device=RC0805FR-07100KL, Manufacturer Part=RC0805FR-07100KL, Supplier=LCSC, Supplier Footprint=0805, Supplier Part=C96346, Symbol=RC0805FR-07100KL, Type="Thick Film Resistor"
R55: library part RC0805FR-071KL, JLCPCB Part Class="Extended Part", LCSC Part Name="厚膜电阻 1kΩ ±1% 125mW", Manufacturer=YAGEO(国巨), Operating Temperature Range=-55℃~+155℃, Temperature Coefficient=±100ppm/℃, Tolerance=±1%, Add into BOM=yes, Convert to PCB=yes, Datasheet=https://atta.szlcsc.com/upload/public/pdf/source/20170708/1499509500945.pdf, Device=RC0805FR-071KL, Manufacturer Part=RC0805FR-071KL, Supplier=LCSC, Supplier Footprint=0805, Supplier Part=C95781, Symbol=RC0805FR-071KL, Type="Thick Film Resistors"
R56: JLCPCB Part Class="Extended Part", Manufacturer=YAGEO(国巨), Manufacturer Part=RC0805FR-0747KL, nameAlias=Value, spicePre=R, spiceSymbolName=RC0805FR-0747KL, Supplier=LCSC, Supplier Part=C126351
R57: library part RC0805FR-0710KL, JLCPCB Part Class="Extended Part", LCSC Part Name="厚膜电阻 10kΩ ±1% 125mW", Manufacturer=YAGEO(国巨), Operating Temperature=-55℃~+155℃, Power(Watts)=125mW, Temperature Coefficient=±100ppm/℃, Tolerance=±1%, Voltage-Supply(Max)=150V, Add into BOM=yes, Convert to PCB=yes, Datasheet=https://atta.szlcsc.com/upload/public/pdf/source/20250610/89E4D743C004A82A45145C7A2CC3A578.pdf, Device=RC0805FR-0710KL, Manufacturer Part=RC0805FR-0710KL, Supplier=LCSC, Supplier Footprint=0805, Supplier Part=C84376, Symbol=RC0805FR-0710KL, Type="Thick Film Resistor"
R58: library part RT0805BRD0745R3L, JLCPCB Part Class="Extended Part", LCSC Part Name="薄膜电阻 45.3Ω ±0.1% 125mW", Manufacturer=YAGEO(国巨), Operating Temperature Range=-55℃~+155℃, Temperature Coefficient=±25ppm/℃, Tolerance=±0.1%, Add into BOM=yes, Convert to PCB=yes, Datasheet=https://atta.szlcsc.com/upload/public/pdf/source/20200610/C326738_5639A9F1B6EB6E4AE2197577D3456E7F.pdf, Device=RT0805BRD0745R3L, Manufacturer Part=RT0805BRD0745R3L, Supplier=LCSC, Supplier Footprint=0805, Supplier Part=C865507, Symbol=RT0805BRD0745R3L, Type="Thin Film Resistor"
R60: library part RC0603FR-076K8L, JLCPCB Part Class="Extended Part", LCSC Part Name="厚膜电阻 6.8kΩ ±1% 100mW", Manufacturer=YAGEO(国巨), Operating Temperature=-55℃~+155℃, Power(Watts)=100mW, Temperature Coefficient=±100ppm/℃, Tolerance=±1%, Voltage-Supply(Max)=75V, Add into BOM=yes, Convert to PCB=yes, Datasheet=https://item.szlcsc.com/datasheet/RC0603FR-076K8L/115876.html, Device=RC0603FR-076K8L, Manufacturer Part=RC0603FR-076K8L, Supplier=LCSC, Supplier Footprint=0603, Supplier Part=C114632, Symbol=RC0603FR-076K8L, Type="Thick Film Resistor"
R61: JLCPCB Part Class="Extended Part", Manufacturer=YAGEO(国巨), Manufacturer Part=RC0805FR-0733K2L, Contributor=LCSC, nameAlias=Value, spicePre=R, spiceSymbolName=RC0805FR-0733K2L, Supplier=LCSC, Supplier Part=C273830
R63: library part RT0805BRC0756KL, JLCPCB Part Class="Extended Part", LCSC Part Name="薄膜电阻 56kΩ ±0.1% 125mW", Manufacturer=YAGEO(国巨), Operating Temperature Range=-55℃~+155℃, Temperature Coefficient=±15ppm/℃, Tolerance=±0.1%, Add into BOM=yes, Convert to PCB=yes, Datasheet=https://atta.szlcsc.com/upload/public/pdf/source/20200720/C706209_4397051C8D9630730FE7B6DC464F826A.pdf, Device=RT0805BRC0756KL, Manufacturer Part=RT0805BRC0756KL, Supplier=LCSC, Supplier Footprint=0805, Supplier Part=C706209, Symbol=RT0805BRC0756KL, Type="Thin Film Resistor"
R64: library part RC0805FR-0712K4L, JLCPCB Part Class="Extended Part", LCSC Part Name="厚膜电阻 12.4kΩ ±1% 125mW", Manufacturer=YAGEO(国巨), Operating Temperature Range=-55℃~+155℃, Temperature Coefficient=±100ppm/℃, Tolerance=±1%, Add into BOM=yes, Convert to PCB=yes, Datasheet=https://atta.szlcsc.com/upload/public/pdf/source/20180821/C275644_0D56F95EFF785E7D9A1FEF436B37DA78.pdf, Device=RC0805FR-0712K4L, Manufacturer Part=RC0805FR-0712K4L, Supplier=LCSC, Supplier Footprint=0805, Supplier Part=C137595, Symbol=RC0805FR-0712K4L, Type="Thick Film Resistors"
R66: library part RC0805FR-07100KL, JLCPCB Part Class="Extended Part", LCSC Part Name="厚膜电阻 100kΩ ±1% 125mW", Manufacturer=YAGEO(国巨), Operating Temperature Range=-55℃~+155℃, Temperature Coefficient=±100ppm/℃, Tolerance=±1%, Add into BOM=yes, Convert to PCB=yes, Datasheet=https://atta.szlcsc.com/upload/public/pdf/source/20170708/1499509500945.pdf, Device=RC0805FR-07100KL, Manufacturer Part=RC0805FR-07100KL, Supplier=LCSC, Supplier Footprint=0805, Supplier Part=C96346, Symbol=RC0805FR-07100KL, Type="Thick Film Resistors"
R67 R109: library part RT0805BRD0713K7L, JLCPCB Part Class="Extended Part", LCSC Part Name="薄膜电阻 13.7kΩ ±0.1% 125mW", Manufacturer=YAGEO(国巨), Operating Temperature=-55℃~+155℃, Power(Watts)=125mW, Temperature Coefficient=±25ppm/℃, Tolerance=±0.1%, Voltage-Supply(Max)=150V, Add into BOM=yes, Convert to PCB=yes, Datasheet=https://atta.szlcsc.com/upload/public/pdf/source/20250609/0E6D5617EADA80FA3B707391883DF2D5.pdf, Device=RT0805BRD0713K7L, Manufacturer Part=RT0805BRD0713K7L, Supplier=LCSC, Supplier Footprint=0805, Supplier Part=C865183, Symbol=RT0805BRD0713K7L, Type="Thin Film Resistor"
R68 R69: JLCPCB Part Class="Extended Part", Manufacturer=YAGEO(国巨), Manufacturer Part=RC1206FR-07120RL, nameAlias=Value, spicePre=R, spiceSymbolName=RC1206FR-07120RL, Supplier=LCSC, Supplier Part=C114928
R76 R78 R79 R87 R90 R96 R97 R100 R101 R104: JLCPCB Part Class="Extended Part", Manufacturer=YAGEO(国巨), Manufacturer Part=RC0603FR-072K4L, nameAlias=Value, spicePre=R, spiceSymbolName=RC0603FR-072K4L, Supplier=LCSC, Supplier Part=C114611
R77 R80 R81 R91 R92 R98 R99 R102 R103 R105 R112: JLCPCB Part Class="Extended Part", Manufacturer=YAGEO(国巨), Manufacturer Part=RT0805BRD0710KL, nameAlias=Value, spicePre=R, spiceSymbolName=RT0805BRD0710KL, Supplier=LCSC, Supplier Part=C110775
R108: library part 0.47R, Manufacturer=YAGEO, Manufacturer Part=RC1206FR-071RL, Contributor=LCEDA_Lib, nameAlias=Value(Ω), spicePre=R, spiceSymbolName=R_0603_EU, Supplier Part=C137355
R110: JLCPCB Part Class="Extended Part", Manufacturer=YAGEO(国巨), Manufacturer Part=RT0805BRB07510KL, Contributor=lcsc, nameAlias=Value, spicePre=R, spiceSymbolName=RT0805BRB07510KL, Supplier=LCSC, Supplier Part=C864415
R111: JLCPCB Part Class="Extended Part", Manufacturer=YAGEO(国巨), Manufacturer Part=RT0805BRD07240KL, Contributor=lcsc, nameAlias=Value, spicePre=R, spiceSymbolName=RT0805BRD07240KL, Supplier=LCSC, Supplier Part=C784586
R116: library part 240kΩ, JLCPCB Part Class="Extended Part", Manufacturer=YAGEO, Manufacturer Part=RC0805FR-0768KL, Contributor=lcsc, nameAlias=Value, spicePre=R, spiceSymbolName=RC0805FR-0768KL, Supplier=LCSC, Supplier Part=C114548
RJ1: JLCPCB Part Class="Extended Part", LCSC Part Name="弯插 带LED", Manufacturer=Ckmtw(灿科盟), Operating Temperature Range=0℃~+70℃, Ratings=-, Add into BOM=yes, Connector Type=RJ45Receptacle, Contact Material=-, Contact Plating=-, Convert to PCB=yes, Datasheet=https://atta.szlcsc.com/upload/public/pdf/source/20190508/C386757_590BCC8A33AAEEF7838490D656B2E4CF.pdf, Device=R-RJ45R08P-C000, LED=WithLED, Manufacturer Part=R-RJ45R08P-C000, Mounting Style=Right-Angle, Number of Ports=1, PoE=-, Shielding=有屏蔽, Soldering Temperature(Max)=-, Supplementary Features=鱼叉脚(塑料), Supplier=LCSC, Supplier Footprint=插件, Supplier Part=C386757, Symbol=R-RJ45R08P-C000
RLY1: Coil Rated Power=360mW, Coil Resistance=70Ω, Coil Voltage=5V, Contact Rating=-, Contact Resistance=100mΩ, JLCPCB Part Class="Extended Part", LCSC Part Name=蓝色, Manufacturer=松乐, Maximum Switching Current=15A, Maximum Switching Voltage=250V@AC, Add into BOM=yes, Coil Type=无极性-单线圈, Contact Form=一组转换:1C(SPDT-转换), Convert to PCB=yes, Datasheet=https://atta.szlcsc.com/upload/public/pdf/source/20200305/C490149_C96E4098A3B1FFB377D5AD2E40B7C2A8.pdf, Device=SRD-05VDC-SL-C, Manufacturer Part=SRD-05VDC-SL-C, Operate Time=10ms, Pin Number=5, Release Time=10ms, Supplier=LCSC, Supplier Footprint=插件,15.6x19.2mm, Supplier Part=C35449, Symbol=SRD-05VDC-SL-C
SW1 SW2 SW3 SW4 SW5: Actuator/Cap Color=Gold, Contact Current=50mA, JLCPCB Part Class="Basic Part", LCSC Part Name="5.1*5.1*1.5mm 立贴 轻触开关", Manufacturer="XKB Connection(中国星坤)", Operating Force=1.6N, Operating Temperature=-30℃~+85℃, Voltage Rating=12V, Actuator Style="Round Button", Add into BOM=yes, Circuit=SPST, Convert to PCB=yes, Datasheet=https://item.szlcsc.com/datasheet/TS-1187A-B-A-B/299976.html, Device=TS-1187A-B-A-B, Length=5.1mm, Life="100,000 Cycles", Manufacturer Part=TS-1187A-B-A-B, Mounting Type="Surface Mount,Vertical", Supplier=LCSC, Supplier Footprint=SMD, Supplier Part=C318884, Switch Height=1.5mm, Symbol=TS-1187A-B-A-B, Width=5.1mm, with Bracket="Without Bracket", With Lamp=No
SW6: Color=Black, Current Rating=25mA, JLCPCB Part Class="Extended Part", LCSC Part Name="间距1.27mm 平拨,凹槽式 8位拨码开关", Manufacturer="XKB Connectivity(中国星坤)", Operating Life=3千次, Operating Temperature=-20℃~+70℃, Voltage Rating=24V, Add into BOM=yes, Circuit=SPST, Convert to PCB=yes, Datasheet=https://atta.szlcsc.com/upload/public/pdf/source/20211009/11BE85C99D2C85B0991AF4F9D6EB8BDE.pdf, Device=DSHP08TS-S, Lead Pitch=1.27mm, Manufacturer Part=DSHP08TS-S, Number of Positions=8Bit, Pin Style="Gull Wing", Supplier=LCSC, Supplier Footprint=SMD-16P,5.4x11.8mm, Supplier Part=C319047, Symbol=DSHP08TS-S, Type=平拨,凹槽式